# Altium PCB PiMX8MP_r0.3.PcbDoc (part 6 of 10)
Units mm, origin at the board's own origin, x right, y up, seen from the top; angles counter-clockwise.
Board outline 55 x 40 mm, 10 copper layers (Top Layer, Layer 1, Layer 2, Layer 3, Layer 4, Layer 5, Layer 6, Layer 7, Layer 8, Bottom Layer), stack 1.472 mm thick; 545 components, 477 nets, 2606 pads, 2278 vias.
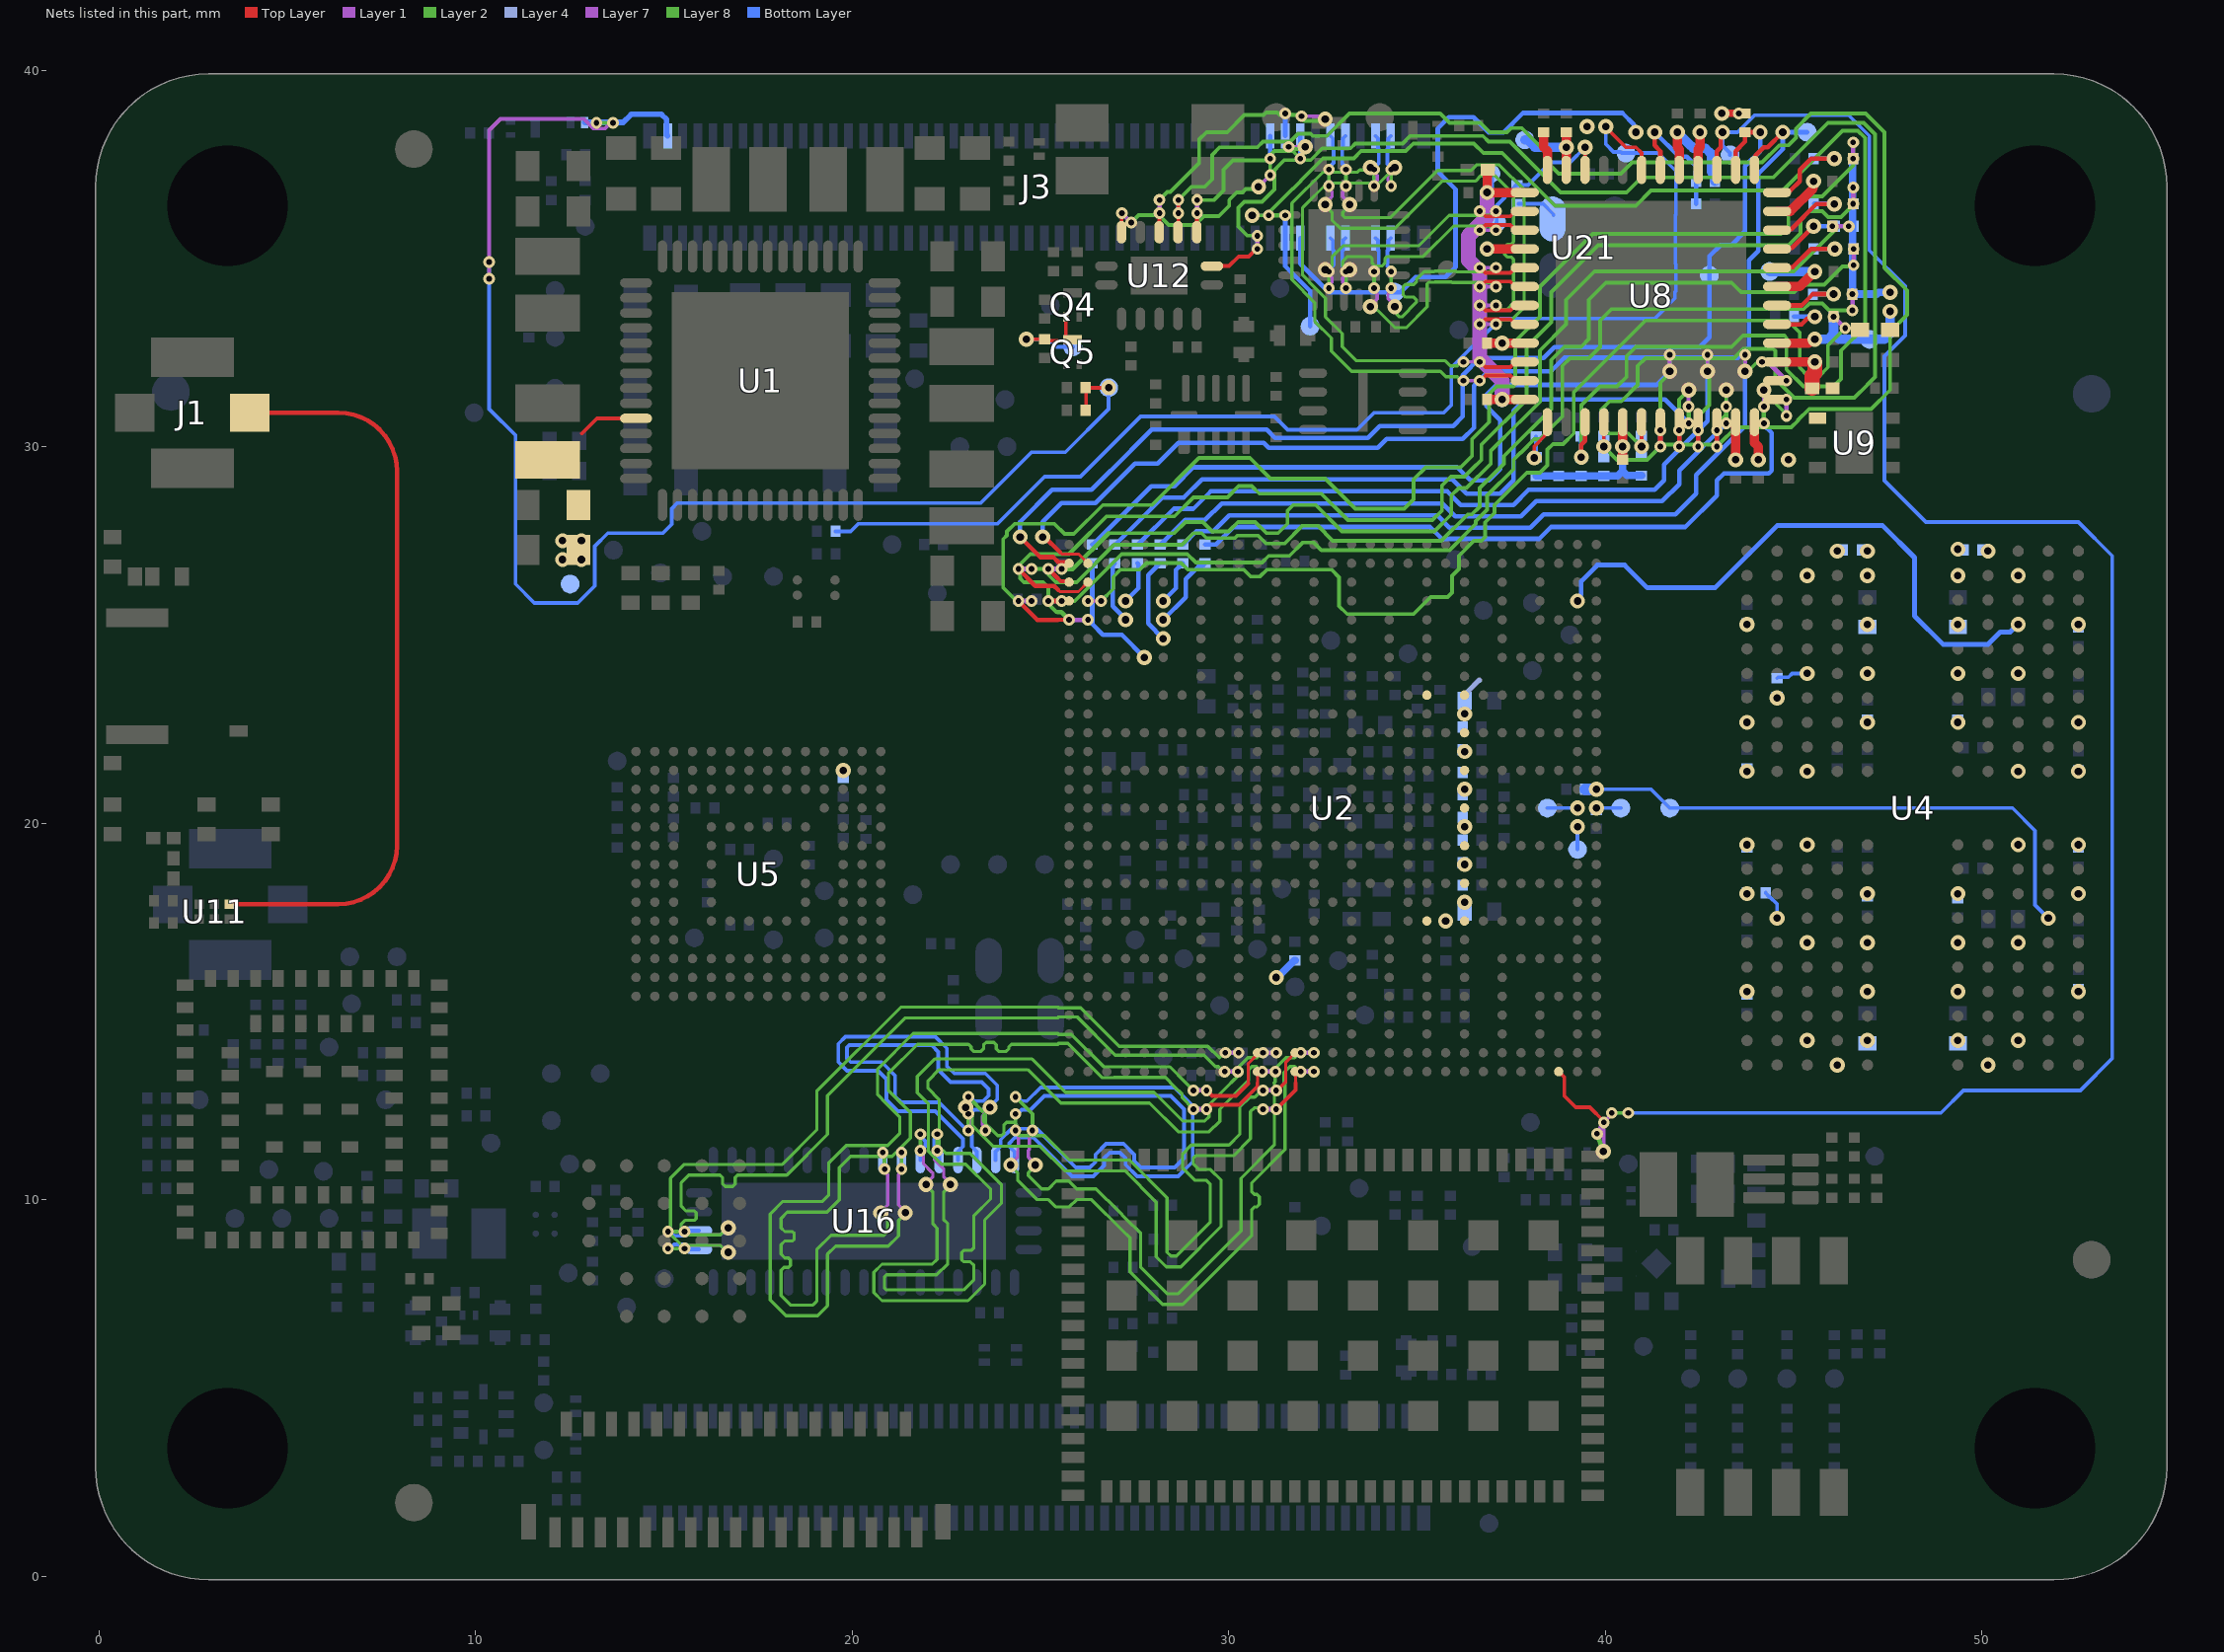
[diagram p14: the nets of this part, all layers, seen from the top]

## Via types
v1: diameter 0.4, hole 0.2, Top Layer to Bottom Layer, tented both sides, 946 vias
v2: diameter 0.31, hole 0.15, Top Layer to Layer 1, tented both sides, 321 vias
v3: diameter 0.31, hole 0.15, Layer 8 to Bottom Layer, tented both sides, 315 vias
v4: diameter 0.31, hole 0.15, Layer 1 to Layer 2, tented both sides, 257 vias
v5: diameter 0.31, hole 0.15, Layer 7 to Layer 8, tented both sides, 198 vias
v6: diameter 0.4, hole 0.2, Layer 2 to Layer 7, tented both sides, 169 vias
v7: diameter 0.31, hole 0.15, Top Layer to Layer 1, tented top, 72 vias

## Nets (pads, with @x,y where several pads share a name; then routed paths per layer and width w, separated by ;. In a path a pad name is that pad's centre, name@x,y a point inside that pad or via, vN(x,y) a via of type N, cw(c..) or ccw(c..) an arc to the next point about the centre after c; other vN are vias at no path point) (continued)
DRAM_B_DQS1_P: U2.AF2 U4.D10 | length 15.7
  Bottom Layer w0.13: v1(39.262,25.904) 39.262,25.978 39.358,26.074 39.358,26.426 39.787,26.854 40.516,26.854 41.116,26.254 42.912,26.254 43.312,26.654 44.562,27.904 47.366,27.904 48.212,27.058 48.212,25.508 48.966,24.754 50.162,24.754 50.487,25.079 50.751,25.079 50.951,25.279 v1(50.962,25.279)
DRAM_MTEST: TP22.TP U2.P2 | length 0.6
  Bottom Layer w0.1: TP22.TP@39.262,19.304 v1(39.262,19.904)
DRAM_ODT_CA_A: R51.2 U4.T2 | length 0.8
  Bottom Layer w0.1: R51.2@44.262,18.154 44.262,18.139 44.347,18.054 44.362,18.054 44.562,17.854 v1(44.562,17.479)
DRAM_ODT_CA_B: R48.2 U4.G2
  other v1: 44.562,23.329
DRAM_RESET: R10.2 TP23.TP U2.T1 U4.T11 | length 14.9
  Bottom Layer w0.1: v1(39.762,20.904) 41.212,20.904 TP23.TP@41.712,20.404 50.812,20.404 51.412,19.804 51.412,17.829 v1(51.762,17.479)
  Bottom Layer w0.3: R10.2@39.462,20.904 v1(39.762,20.904)
DRAM_VCC1.1: C17.1 C18.1 C91.1 C92.1 C93.1 C94.1 C95.1 C100.1 C101.1 C102.1 C103.1 C104.1 C121.1 C122.1 C123.1 C124.1 C125.1 C126.1 C127.1 C128.1 C129.1 C130.1 C131.1 C132.1 C133.1 C134.1 C135.1 C136.1 L6.2 R48.1 R51.1 R54.1 R55.1 TP7.TP U1.52 U2.AA8 U2.AA10 U2.J8 U2.J10 U2.L8 U2.N8 U2.R8 U2.U8 U2.W8 U4.A4 U4.A9 U4.AA3 U4.AA5 U4.AA8 U4.AA10 U4.AB4 U4.AB9 U4.B3 U4.B5 U4.B8 U4.B10 U4.D1 U4.D5 U4.D8 U4.D12 U4.F3 U4.F5 U4.F8 U4.F10 U4.H1 U4.H5 U4.H8 U4.H12 U4.K1 U4.K3 U4.K10 U4.K12 U4.N1 U4.N3 U4.N10 U4.N12 U4.R1 U4.R5 U4.R8 U4.R12 U4.U3 U4.U5 U4.U8 U4.U10 U4.W1 U4.W5 U4.W8 U4.W12 | length 2.9
  Top Layer w0.1: 12.824,30.354 13.224,30.754 U1.52@14.262,30.754
  Layer 4 w0.14: 36.357,23.504 36.657,23.804
  Bottom Layer w0.1: R48.1@44.562,23.854 44.586,23.879 44.862,23.879 44.963,23.979 v1(45.362,23.979)
  other v1: 46.162,13.579 50.162,13.579 45.362,14.229 46.962,14.229 49.362,14.229 50.962,14.229 43.762,15.529 46.962,15.529 49.362,15.529 52.562,15.529 45.362,16.829 46.962,16.829 49.362,16.829 50.962,16.829 35.762,17.404 36.262,17.904 43.762,18.129 46.962,18.129 49.362,18.129 52.562,18.129 36.262,18.904 43.762,19.429 45.362,19.429 50.962,19.429 52.562,19.429 36.262,19.904 36.262,20.904 43.762,21.379 45.362,21.379 50.962,21.379 52.562,21.379 36.262,21.904 43.762,22.679 46.962,22.679 49.362,22.679 52.562,22.679 36.262,22.904 46.962,23.979 49.362,23.979 50.962,23.979 43.762,25.279 46.962,25.279 49.362,25.279 52.562,25.279 45.362,26.579 46.962,26.579 49.362,26.579 50.962,26.579 12.312,27.005 12.812,27.004 46.162,27.229 50.162,27.229 12.312,27.505 12.812,27.504
DRAM_VREF: TP20.TP U2.R2 | length 0.8
  Bottom Layer w0.1: TP20.TP@38.462,20.404 v1(39.262,20.404)
DRAM_ZN: R11.2 TP21.TP U2.R1 | length 0.6
  Bottom Layer w0.1: v1(39.762,20.404) TP21.TP@40.412,20.404
DRAM_ZQ0: R54.2 U4.A5
  other v1: 46.962,27.229
DRAM_ZQ1: R55.2 U4.A8
  other v1: 49.362,27.279
DSI1_CLK_N: U2.B18 U16.34 | length 27.7
  Layer 1 w0.12: v4(30.912,13.904) v2(31.262,13.904)
  Layer 2 w0.085: v6(22.612,10.404) 22.612,10.38 22.43,10.197 22.43,9.474 22.54,9.364 22.54,8.298 22.246,8.004 20.912,8.004 20.862,7.954 20.862,7.654 20.912,7.604 22.959,7.604 23.235,7.88 23.235,8.254 23.135,8.354 22.962,8.354 22.912,8.404 22.912,8.604 22.962,8.654 23.161,8.654 23.235,8.728 23.235,9.577 23.677,10.019 23.677,10.286 23.019,10.944 22.369,10.944 22.027,11.286 22.027,12.539 21.729,12.838 21.729,13.274 22.194,13.739 24.78,13.739 25.665,12.854 28.015,12.854 28.78,12.089 29.362,12.089 29.477,12.204 29.477,12.523 30.059,13.104
  Layer 2 w0.09: 30.059,13.104 30.287,13.332 30.287,13.549 30.513,13.774 30.749,13.774 30.879,13.904 v4(30.912,13.904)
  Layer 7 w0.085: 22.18,11.161 22.18,11.072 22.23,11.022 22.232,11.022 22.43,10.824 22.43,10.612 22.612,10.429 v6(22.612,10.404)
  Layer 8 w0.1: v5(22.262,11.304) v3(22.262,11.744)
  Bottom Layer w0.1: v3(22.262,11.744) 22.262,11.688 22.177,11.603 22.177,11.413 22.312,11.278 U16.34@22.312,11.054
DSI1_CLK_P: U2.A18 U16.33 | length 28
  Layer 1 w0.12: v4(30.892,13.404) v2(31.242,13.404)
  Layer 2 w0.085: v6(21.962,10.404) 21.962,10.38 22.145,10.197 22.145,9.356 22.255,9.246 22.255,8.416 22.128,8.289 20.794,8.289 20.577,8.073 20.577,7.536 20.794,7.319 23.077,7.319 23.52,7.762 23.52,9.459 23.962,9.901 23.962,10.404 23.137,11.229 22.487,11.229 22.462,11.254 22.312,11.404 22.312,12.658 22.014,12.956 22.014,13.156 22.312,13.454 23.012,13.454 24.312,13.454 24.662,13.454 25.547,12.569 27.897,12.569 28.662,11.804 29.48,11.804 29.762,12.086 29.762,12.404 30.462,13.104
  Layer 2 w0.09: 30.462,13.104 30.527,13.169 30.527,13.449 30.612,13.534 30.729,13.534 30.859,13.404 v4(30.892,13.404)
  Layer 7 w0.085: v5(21.812,11.304) 21.812,11.244 21.895,11.161 21.895,10.954 22.111,10.737 22.114,10.737 22.145,10.706 22.145,10.612 21.962,10.429 v6(21.962,10.404)
  Layer 8 w0.1: v5(21.812,11.304) v3(21.812,11.744)
  Bottom Layer w0.1: U16.33@21.812,11.054 21.812,11.278 21.947,11.413 21.947,11.556 21.812,11.691 v3(21.812,11.744)
DSI1_D0_N: U2.B16 U16.38 | length 30
  Layer 1 w0.12: v4(31.912,13.904) v2(32.262,13.904)
  Layer 2 w0.085: v6(24.862,10.924) 24.862,10.9 24.68,10.717 24.68,10.644 25.034,10.289 25.212,10.289 25.42,10.497 25.755,10.497 25.962,10.289 26.48,10.289 27.077,9.693 27.264,9.506 27.662,9.108 27.662,8.204 28.362,7.504 28.659,7.504 30.327,9.173 30.327,10.569 31.21,11.452 31.21,13.104
  Layer 2 w0.09: 31.21,13.104 31.232,13.127 31.232,13.483 31.523,13.774 31.749,13.774 31.879,13.904 v4(31.912,13.904)
  Layer 7 w0.085: v5@24.787,11.779 24.705,11.696 24.705,11.432 24.705,11.339 24.68,11.314 24.68,11.132 24.862,10.949 v6(24.862,10.924)
  Layer 8 w0.1: v3(24.337,12.729) 24.787,12.279 v5(24.787,11.839)
  Bottom Layer w0.1: U16.38@24.312,11.054 24.312,11.278 24.177,11.413 24.177,11.504 24.327,11.654 24.812,11.654 25.842,10.624 26.407,10.624 26.692,10.909 26.692,11.104 26.842,11.254 27.112,11.254 27.262,11.104 27.262,10.929 27.566,10.624 28.657,10.624 29.042,11.009 29.042,12.5 28.557,12.984 25.007,12.984 24.642,12.619 24.501,12.619 24.391,12.729 v3(24.337,12.729)
DSI1_D0_P: U2.A16 U16.37 | length 29.8
  Layer 1 w0.12: v4(31.912,13.404) v2(32.262,13.404) v2@32.312,13.404
  Layer 2 w0.085: v6(24.212,10.924) 24.212,10.9 24.395,10.717 24.395,10.526 24.916,10.004 25.212,10.004 25.405,9.812 25.77,9.812 25.962,10.004 26.362,10.004 27.163,9.204 27.377,8.989 27.377,8.086 28.244,7.219 28.777,7.219 30.612,9.054 30.612,9.554 30.612,9.743 30.679,9.81 30.749,9.81 30.816,9.877 30.816,10.078 30.749,10.145 30.679,10.145 30.612,10.212 30.612,10.254 30.612,10.451 31.495,11.334 31.495,13.104
  Layer 2 w0.09: 31.495,13.104 31.472,13.127 31.472,13.384 31.623,13.534 31.749,13.534 31.879,13.404 v4(31.912,13.404)
  Layer 7 w0.085: v6(24.212,10.924) 24.212,10.949 24.395,11.132 24.395,11.432 24.42,11.457 24.42,11.696 v5@24.337,11.779
  Layer 8 w0.1: v5(24.337,11.839) v3(24.337,12.279)
  Bottom Layer w0.1: U16.37@23.812,11.054 23.812,11.278 23.947,11.413 23.947,11.6 24.232,11.884 24.907,11.884 25.937,10.854 26.312,10.854 26.462,11.004 26.462,11.2 26.747,11.484 27.207,11.484 27.492,11.2 27.492,11.024 27.662,10.854 28.562,10.854 28.812,11.104 28.812,12.404 28.462,12.754 25.102,12.754 24.737,12.389 24.501,12.389 24.391,12.279 v3(24.337,12.279)
DSI1_D1_N: U2.B17 U16.36 | length 29.5
  Top Layer w0.08: 31.499,13.12 31.517,13.138 31.517,13.659 U2.B17@31.762,13.904
  Top Layer w0.1: v2@31.258,12.879 31.499,13.12
  Layer 1 w0.12: v4(30.912,12.904) v2(31.262,12.904)
  Layer 2 w0.085: v6(23.662,12.454) 23.662,12.43 23.48,12.247 23.48,12.087 23.762,11.804 23.862,11.704 23.966,11.704 24.033,11.771 24.033,11.993 24.1,12.06 24.301,12.06 24.368,11.993 24.368,11.771 24.435,11.704 24.812,11.704 25.112,11.704 25.762,11.054 27.365,11.054 28.362,10.058 28.362,8.604 28.462,8.504 28.609,8.504 29.512,9.408 29.512,10.406 29.399,10.519 29.094,10.519 28.777,10.836 28.777,11.223 29.009,11.454 30.009,11.454 30.295,11.74 30.295,12.46 30.561,12.727 30.691,12.727 30.869,12.904 v4(30.912,12.904)
  Layer 7 w0.085: v5(23.537,11.839) 23.537,11.9 23.455,11.983 23.455,12.222 23.662,12.43 v6(23.662,12.454)
  Layer 8 w0.1: v3(23.087,12.729) 23.537,12.279 v5(23.537,11.839)
  Bottom Layer w0.1: v3(23.087,12.729) 23.141,12.729 23.251,12.619 23.477,12.619 23.622,12.764 23.622,12.944 23.442,13.124 22.617,13.124 22.288,13.453 22.288,13.929 22.112,14.104 19.921,14.104 19.862,14.046 19.862,13.754 19.962,13.654 20.787,13.654 21.142,13.3 21.142,12.75 21.307,12.584 22.307,12.584 23.177,11.715 23.177,11.413 23.312,11.278 U16.36@23.312,11.054
DSI1_D1_P: U2.A17 U16.35 | length 29.9
  Top Layer w0.08: U2.A17@31.762,13.404 31.776,13.39 31.776,13.104
  Top Layer w0.1: v2(31.262,12.404) 31.776,12.919 31.776,13.104
  Layer 1 w0.12: v4(30.912,12.404) v2(31.262,12.404)
  Layer 2 w0.085: v6(23.012,12.454) 23.012,12.43 23.195,12.247 23.195,11.969 23.744,11.419 24.994,11.419 25.644,10.769 27.247,10.769 28.077,9.939 28.077,8.486 28.261,8.303 28.344,8.219 28.727,8.219 29.797,9.289 29.797,10.524 29.517,10.804 29.212,10.804 29.062,10.954 29.062,11.104 29.127,11.169 30.127,11.169 30.58,11.622 30.58,12.342 30.679,12.442 30.875,12.442 v4(30.912,12.404)
  Layer 7 w0.085: v6(23.012,12.454) 23.012,12.405 23.17,12.247 23.17,11.983 23.087,11.9 v5(23.087,11.839)
  Layer 8 w0.1: v5(23.087,11.839) v3(23.087,12.279)
  Bottom Layer w0.1: U16.35@22.812,11.054 22.812,11.278 22.947,11.413 22.947,11.619 22.212,12.354 21.212,12.354 20.912,12.654 20.912,13.204 20.692,13.424 19.867,13.424 19.632,13.659 19.632,14.141 19.826,14.334 22.207,14.334 22.518,14.024 22.518,13.549 22.712,13.354 23.537,13.354 23.852,13.04 23.852,12.669 23.572,12.389 23.251,12.389 23.141,12.279 v3(23.087,12.279) v3@23.087,12.226
DSI1_D2_N: U2.B19 U16.32 | length 28.7
  Top Layer w0.08: 30.517,13.104 30.517,13.303 30.517,13.62 30.762,13.865 U2.B19@30.762,13.904
  Top Layer w0.1: v2(29.412,12.904) 29.562,12.754 30.187,12.754 30.517,13.085 30.517,13.104
  Layer 1 w0.12: v4(29.062,12.904) v2(29.412,12.904)
  Layer 2 w0.085: v6(21.412,9.654) 21.412,9.63 21.23,9.447 21.23,9.036 20.963,8.769 19.562,8.769 19.347,8.554 19.347,7.186 19.08,6.919 18.244,6.919 17.827,7.336 17.827,9.623 18.159,9.954 19.212,9.954 19.377,10.119 19.377,10.973 19.844,11.439 20.947,11.439 21.262,11.754 21.262,12.201 20.911,12.553 20.677,12.786 20.677,13.473 21.619,14.414 25.462,14.414 ; 26.686,13.531 28.436,13.531 28.843,13.123 v4(29.062,12.904)
  Layer 2 w0.09: 25.462,14.414 25.485,14.392 25.825,14.392 26.686,13.531
  Layer 7 w0.085: v5(21.312,10.814) 21.312,10.754 21.23,10.671 21.23,10.092 21.23,9.862 21.412,9.679 v6(21.412,9.654)
  Layer 8 w0.1: v5(21.312,10.814) v3(21.312,11.254)
DSI1_D2_P: U2.A19 U16.31 | length 28.6
  Top Layer w0.08: 30.762,13.104 U2.A19@30.762,13.404
  Top Layer w0.1: v2(29.412,12.404) 29.532,12.524 30.282,12.524 30.762,13.004 30.762,13.104
  Layer 1 w0.12: v4(29.062,12.404) v2(29.412,12.404)
  Layer 2 w0.085: v6(20.762,9.654) 20.762,9.63 20.945,9.447 20.945,9.154 20.845,9.054 19.444,9.054 19.062,8.673 19.062,7.304 18.962,7.204 18.362,7.204 18.112,7.454 18.112,8.129 18.187,8.204 18.312,8.204 18.362,8.254 18.362,8.405 18.312,8.454 18.212,8.454 18.112,8.554 18.112,8.804 18.212,8.904 18.412,8.904 18.462,8.954 18.462,9.104 18.412,9.154 18.212,9.154 18.112,9.254 18.112,9.504 18.277,9.669 19.33,9.669 19.662,10.001 19.662,10.854 19.962,11.154 21.065,11.154 21.547,11.636 21.547,12.319 20.962,12.904 20.962,13.354 21.737,14.129 22.712,14.129 22.755,14.129 23.09,14.129 23.157,14.062 23.157,14.006 23.224,13.939 23.425,13.939 23.492,14.006 23.492,14.112 23.559,14.179 23.76,14.179 23.827,14.112 23.827,14.006 23.894,13.939 24.095,13.939 24.162,14.006 24.162,14.062 24.229,14.129 24.87,14.129 24.912,14.129 25.462,14.129 ; 26.631,13.246 26.962,13.246 ; 28.318,13.246 28.558,13.005 28.765,12.799 28.765,12.713 29.062,12.416 v4(29.062,12.404)
  Layer 2 w0.09: 25.462,14.129 25.485,14.152 25.725,14.152 26.631,13.246 ; 26.962,13.246 28.318,13.246
  Layer 7 w0.085: v6(20.762,9.654) 20.762,9.679 20.945,9.862 20.945,10.21 20.945,10.671 20.862,10.754 v5(20.862,10.814)
  Layer 8 w0.1: v5(20.862,10.814) v3@20.862,11.254
  other v3: 20.812,11.254
DSI1_D3_N: U2.B20 U16.18 | length 24
  Layer 1 w0.12: v4(29.912,13.904) v2(30.262,13.904)
  Layer 2 w0.085: v6(16.712,8.604) 16.687,8.604 16.505,8.787 15.477,8.787 15.177,9.086 15.177,10.573 15.544,10.939 18.147,10.939 19.062,11.854 19.062,12.886 21.293,15.117 25.462,15.117
  Layer 2 w0.09: 25.462,15.117 25.485,15.094 26.072,15.094 27.087,14.079 28.397,14.079 29.444,14.079 29.749,13.774 29.879,13.904 v4(29.912,13.904)
  Layer 7 w0.085: v5(15.552,8.704) 15.613,8.704 15.696,8.787 16.157,8.787 16.505,8.787 16.687,8.604 v6(16.712,8.604)
  Layer 8 w0.1: v3(15.112,8.704) v5(15.552,8.704)
  Bottom Layer w0.1: v3(15.112,8.704) 15.166,8.704 15.276,8.814 15.363,8.814 15.458,8.814 15.579,8.814 15.714,8.679 U16.18@15.937,8.679
DSI1_D3_P: U2.A20 U16.19 | length 24.1
  Layer 1 w0.12: v4(29.892,13.404) v2(30.242,13.404)
  Layer 2 w0.085: v6(16.712,9.254) 16.687,9.254 16.505,9.072 15.595,9.072 15.562,9.104 15.462,9.204 15.462,9.354 15.562,9.454 15.812,9.454 15.862,9.504 15.862,9.654 15.812,9.704 15.587,9.704 15.462,9.829 15.462,10.454 15.662,10.654 16.116,10.654 16.493,10.654 16.56,10.587 16.56,10.421 16.627,10.354 16.828,10.354 16.895,10.421 16.895,10.587 16.962,10.654 17.912,10.654 18.265,10.654 19.347,11.736 19.347,12.768 21.411,14.832 25.462,14.832
  Layer 2 w0.09: 25.462,14.832 25.485,14.854 25.973,14.854 26.988,13.839 28.496,13.839 29.345,13.839 29.65,13.534 29.729,13.534 29.859,13.404 v4(29.892,13.404)
  Layer 7 w0.085: v5(15.552,9.154) 15.613,9.154 15.696,9.072 16.275,9.072 16.505,9.072 16.687,9.254 v6(16.712,9.254)
  Layer 8 w0.1: v3(15.112,9.154) v5(15.552,9.154)
  Bottom Layer w0.1: v3(15.112,9.154) 15.166,9.154 15.276,9.044 15.579,9.044 15.714,9.179 U16.19@15.937,9.179
DSI_VREG1_CAP: C114.1 U2.F18 | length 0.7
  Bottom Layer w0.2: v1(31.262,15.904) 31.3,15.904 31.642,16.247 31.642,16.249 31.747,16.354 C114.1@31.762,16.354
eMMC_VDDI: C141.1 U5.C2
  other v1: 19.762,21.404
EN_SHIFT: Q4.1 Q5.3 R160.1 TP103.TP | length 3.3
  Top Layer w0.1: v1(24.627,32.854) R160.1@25.112,32.854 ; R160.1@25.103,32.819 25.828,32.819 Q5.3@25.853,32.844 25.753,32.844 25.678,32.919 Q4.1@25.678,33.444
  Bottom Layer w0.1: v1(24.627,32.854) 25.228,32.854 25.428,32.654 TP103.TP@25.862,32.654
ENET_125O_SYNCE: J3.16 R98.1 TP70.TP | length 15.3
  Bottom Layer w0.12: J3.16@31.902,35.544 31.902,34.864 32.662,34.104 34.562,34.104 34.962,34.504 35.754,34.504 36.022,34.772 36.022,36.84 35.55,37.312 35.55,38.45 35.85,38.75 36.5,38.75 36.9,38.35 37.3,38.35 37.814,38.864 40.452,38.864 40.759,38.558 40.759,38.408 v1(40.812,38.354)
ENET_125O_SYNCE_R: R97.1 R98.2 R104.2 U8.42 | length 3.5
  Top Layer w0.12: v1(41.312,38.354) 41.312,38.004 41.462,37.854 U8.42@41.462,37.354
  Bottom Layer w0.12: v1(41.312,38.354) 41.962,37.704 42.162,37.704 42.399,37.467 42.399,37.067 R97.1@42.412,37.054 R104.2@42.412,36.454
ENET_I\N\T\: R75.1 TP67.TP U2.A3 U8.39 | length 53.9
  Top Layer w0.1: U2.A3@38.762,13.404 38.912,13.254 38.912,12.754 39.212,12.454 39.59,12.454 39.962,12.082 v2(39.962,12.054)
  Top Layer w0.12: U8.39@42.962,37.354 42.962,37.854 43.062,37.954 43.062,38.304 v1(43.112,38.354)
  Layer 1 w0.12: v4(39.78,11.753) v2@39.905,11.97
  Layer 2 w0.12: v4(39.78,11.753) v6(39.951,11.283)
  Layer 7 w0.1: v6(39.951,11.283) 39.951,12.052 40.172,12.273 v5(40.172,12.304)
  Layer 8 w0.1: v5(40.172,12.304) v3(40.612,12.304)
  Bottom Layer w0.1: v3(40.612,12.304) 48.912,12.304 49.512,12.904 52.612,12.904 53.462,13.754 53.462,27.104 52.562,28.004 48.512,28.004 47.412,29.104 47.412,32.404 47.962,32.954 47.962,34.263 47.012,35.213 47.012,38.254 46.462,38.804 43.962,38.804 43.512,38.354 v1(43.112,38.354) ; v1@43.112,38.346 43.112,38.004 43.312,37.804 TP67.TP@43.312,37.754
ENET_ISET: R91.1 U8.48 | length 1
  Top Layer w0.25: R91.1@38.362,38.354 38.362,37.954 38.462,37.854 U8.48@38.462,37.354
ENET_LED1_ACTIVITY: R94.1 R101.2 U8.18 U12.1 | length 40.7
  Top Layer w0.1: U12.1@29.553,34.799 30.006,34.799 30.262,35.054 30.531,35.054 30.731,35.254 v2(30.762,35.254) ; v1(40.962,30.004) U8.18@40.962,30.654
  Layer 1 w0.12: v2(30.762,35.254) v4(30.762,35.604)
  Layer 2 w0.1: v4(30.762,35.604) 30.757,35.609 30.49,35.609 30.254,35.846 30.254,36.346 30.412,36.504 30.887,36.504 31.212,36.83 31.212,37.349 31.262,37.399 31.262,37.404 31.473,37.616 32.176,37.616 32.489,37.928 33.236,37.928 33.362,38.054 34.619,38.054 34.819,38.254 36.752,38.254 36.902,38.104 37.462,38.104 38.812,36.754 40.562,36.754 40.962,37.154 44.462,37.154 45.912,38.604 46.862,38.604 47.162,38.304 47.162,31.854 46.962,31.654 46.962,31.652 46.615,31.304 45.012,31.304 44.512,31.804 44.512,32.546 44.454,32.604 43.662,32.604 43.412,32.354 41.067,32.354 40.862,32.149 40.862,31.644 40.422,31.204 40.112,31.204 39.887,30.979 39.887,30.534 40.067,30.354 40.612,30.354 v1(40.962,30.004)
ENET_LED2_LINK: R95.1 R102.2 U8.16 U12.3 | length 40
  Top Layer w0.1: U12.3@28.653,35.699 28.662,35.708 v2(28.662,36.554) ; v1(39.962,30.004) U8.16@39.962,30.654
  Layer 1 w0.12: v4(28.662,36.204) v2(28.662,36.554)
  Layer 2 w0.1: v4(28.662,36.204) v2(28.662,36.554) 29.012,36.904 29.362,36.904 29.562,37.104 29.562,37.754 29.762,37.954 30.762,37.954 30.912,38.104 31.628,38.104 31.839,38.316 32.176,38.316 32.237,38.254 32.607,38.254 33.207,38.854 35.612,38.854 35.862,38.604 36.684,38.604 36.934,38.354 37.39,38.354 37.501,38.466 37.776,38.466 38.387,37.854 38.387,37.629 38.762,37.254 40.412,37.254 40.712,37.554 44.162,37.554 44.612,38.004 44.857,38.004 45.062,38.209 45.062,38.454 45.462,38.854 46.912,38.854 47.412,38.354 47.412,34.754 48.012,34.154 48.012,33.504 47.562,33.054 47.562,31.504 47.062,31.004 45.412,31.004 45.117,30.709 45.117,30.696 44.939,30.517 43.475,30.517 43.012,30.054 41.512,30.054 41.112,29.654 40.312,29.654 v1(39.962,30.004)
ENET_LED3/GPIO2: J3.18 R96.1 R103.2 TP71.TP U8.15 | length 41.4
  Top Layer w0.12: v1(39.362,29.724) 39.362,30.054 39.462,30.154 U8.15@39.462,30.654
  Layer 2 w0.1: v6(30.622,36.144) 30.988,36.144 31.698,36.854 31.707,36.854 31.912,37.059 31.912,37.069 32.505,37.662 33.319,37.662 33.512,37.854 34.701,37.854 34.901,38.054 36.512,38.054 36.762,37.804 37.262,37.804 38.662,36.404 40.812,36.404 41.212,36.804 44.712,36.804 46.3,38.392 46.709,38.392 46.897,38.203 46.897,33.189 46.262,32.554 46.262,31.804 46.062,31.604 45.262,31.604 44.812,32.054 44.812,32.896 44.754,32.954 43.657,32.954 43.357,32.654 40.812,32.654 40.562,32.404 40.562,31.854 40.312,31.604 39.862,31.604 39.362,31.104 v1(39.362,29.724)
  Layer 7 w0.1: v6(30.622,36.144) v5(31.062,36.144)
  Layer 8 w0.12: v5(31.062,36.144) v3(31.502,36.144)
  Bottom Layer w0.12: v3(31.502,36.144) J3.18@31.502,35.544 31.502,34.794 32.162,34.134 TP71.TP@32.162,33.204 ; v1(39.362,29.724) R103.2@39.362,30.274
ENET_LED5/GPIO4: R92.1 R99.2 U8.13 | length 1.7
  Top Layer w0.1: v1(38.112,29.704) 38.112,30.009 38.39,30.287 38.39,30.292 38.462,30.364 U8.13@38.462,30.654
  Bottom Layer w0.1: v1(38.112,29.704) 38.142,29.704 R92.1@38.162,29.724 R99.2@38.162,30.274
ENET_MDC: TP61.TP U2.AH28 U8.37 | length 31.4
  Top Layer w0.08: 25.515,27.202 25.567,27.149 26.017,27.149 U2.AH28@26.262,26.904
  Top Layer w0.12: v1(25.062,27.604) 25.112,27.604 25.515,27.202 ; U8.37@43.962,37.354 43.987,37.379 43.987,37.729 44.212,37.954 44.312,37.954 v1(44.712,38.354)
  Bottom Layer w0.12: v1(25.062,27.604) 25.062,28.004 25.562,28.504 26.462,28.504 27.512,29.554 28.112,29.554 28.662,30.104 30.932,30.104 31.062,29.974 33.962,29.974 34.192,30.204 36.212,30.204 36.512,30.504 36.512,31.624 36.892,32.004 38.552,32.004 38.912,32.364 43.522,32.364 43.812,32.654 43.812,34.954 44.062,35.204 44.062,37.254 44.712,37.904 v1(44.712,38.354) TP61.TP@45.362,38.354
ENET_MDIO: R73.1 TP63.TP U2.AH29 U8.38 | length 30.8
  Top Layer w0.12: v1(24.462,27.604) 24.997,27.069 25.343,27.069 25.483,26.929 25.737,26.929 U2.AH29@25.762,26.904 ; U8.38@43.462,37.354 43.462,37.854 43.712,38.104 R73.1@43.712,38.354 v1(44.112,38.354)
  Bottom Layer w0.12: v1(24.462,27.604) 24.462,28.004 25.312,28.854 26.362,28.854 27.408,29.9 27.408,29.909 27.953,30.454 31.012,30.454 31.227,30.239 33.697,30.239 34.012,30.554 35.962,30.554 36.212,30.804 36.212,31.9 36.666,32.354 38.362,32.354 38.652,32.644 42.502,32.644 42.762,32.904 42.762,35.064 43.063,35.364 43.352,35.364 43.712,35.724 43.712,37.454 44.112,37.854 v1(44.112,38.354)
ENET_nLED1: J3.19 U12.6 | length 6.4
  Top Layer w0.1: U12.6@27.153,35.699 27.158,35.703 27.158,36.2 v2(27.162,36.204)
  Layer 1 w0.12: v2(27.162,36.204) v4(27.41,35.957)
  Layer 2 w0.1: v4(27.41,35.957) 27.607,36.154 28.147,36.154 28.412,35.889 29.097,35.889 29.337,36.129 29.737,36.129 30.012,36.404 30.012,36.554 30.212,36.754 30.357,36.754 30.449,36.846 30.734,36.846 v6(30.791,36.903)
  Layer 7 w0.1: v6(30.791,36.903) v5(31.102,37.214)
  Layer 8 w0.1: v5(31.102,37.214) v3(31.102,37.654)
  Bottom Layer w0.12: v3(31.102,37.654) J3.19@31.102,38.254
ENET_nLED2: J3.17 U12.4 | length 8.2
  Top Layer w0.1: U12.4@28.153,35.699 28.158,35.703 28.158,36.2 v2(28.162,36.204)
  Layer 1 w0.12: v2(28.162,36.204) v4(28.162,36.554)
  Layer 2 w0.1: v4(28.162,36.554) 28.372,36.764 28.447,36.764 29.212,37.53 29.212,38.154 29.412,38.354 29.962,38.354 30.417,38.809 30.927,38.809 30.997,38.88 31.287,38.88 31.358,38.809 31.857,38.809 32.012,38.654 32.512,38.654 v6(32.562,38.704)
  Layer 7 w0.1: v5(31.936,38.778) v6@32.407,38.778
  Layer 8 w0.1: v3(31.502,38.854) v5(31.936,38.778)
  Bottom Layer w0.12: J3.17@31.502,38.254 v3(31.502,38.854)
ENET_nLED3: J3.15 U12.2 | length 6.1
  Top Layer w0.1: U12.2@29.153,35.699 29.158,35.703 29.158,36.2 v2(29.162,36.204)
  Layer 1 w0.12: v2(29.162,36.204) v4(29.162,36.554)
  Layer 2 w0.1: v4(29.162,36.554) 29.612,36.554 29.862,36.804 29.862,37.354 30.112,37.604 30.962,37.604 31.212,37.854 31.712,37.854 31.766,37.908 31.974,37.908 v6(32.031,37.966)
  Layer 7 w0.1: v5(31.591,37.966) v6(32.031,37.966)
  Layer 8 w0.1: v5(31.591,37.966) v3(31.902,37.654)
  Bottom Layer w0.12: v3(31.902,37.654) J3.15@31.902,38.254
ENET_R\S\T\: R3.2 R74.1 TP64.TP U8.43 | length 33.5
  Top Layer w0.1: v1(40.012,38.504) 40.012,38.489 40.547,37.954 40.812,37.954 40.962,37.804 U8.43@40.962,37.354
  Bottom Layer w0.1: R3.2@19.562,27.754 19.962,27.754 20.162,27.954 23.862,27.954 25.112,29.204 26.062,29.204 27.662,30.804 31.212,30.804 31.567,30.449 33.407,30.449 33.862,30.904 35.712,30.904 35.912,31.104 35.912,32.104 37.212,33.404 41.312,33.404 41.85,33.942 41.85,34.111 41.875,34.136 41.875,34.847 41.862,34.859 41.862,36.149 41.875,36.162 41.875,37.325 41.4,37.8 40.442,37.8 40.409,37.833 40.217,37.833 40.012,38.038 v1(40.012,38.504)
ENET_RD0: R76.1 U2.AG29 | length 29.1
  Top Layer w0.1: 25.462,26.504 25.542,26.424 25.742,26.424 U2.AG29@25.762,26.404
  Top Layer w0.12: v2(25.212,26.754) 25.462,26.504
  Layer 1 w0.12: v2(25.212,26.754) v4(25.562,26.754) ; v2(46.032,35.854) v4(46.465,35.854)
  Layer 2 w0.1: 26.812,27.704 28.555,27.704 28.855,28.004 29.312,28.004 29.562,27.754 29.998,27.754 30.248,28.004 30.702,28.004 31.002,27.704 31.312,27.704 31.562,27.954 31.562,28.304 31.712,28.454 32.312,28.454 33.012,27.754 35.462,27.754 35.912,28.204 35.912,28.704 36.112,28.904 36.312,28.904 36.962,29.554 36.962,29.898 37.719,30.654 37.723,30.654 38.262,31.194 38.262,32.554 38.962,33.254 38.962,33.904 39.712,34.654 44.997,34.654 46.197,35.854 v4(46.465,35.854)
  Layer 2 w0.12: v4(25.562,26.754) 25.862,26.754 26.812,27.704
ENET_RD0_R: R72.1 R76.2 R89.2 U8.33 | length 1.8
  Top Layer w0.12: U8.33@44.562,35.254 44.587,35.279 44.957,35.279 45.442,35.764 45.457,35.764 45.532,35.839 v1(45.532,35.854)
  Bottom Layer w0.12: v1(45.532,35.854) R72.1@46.092,35.854
ENET_RD1: R77.1 U2.AG28 | length 31
  Top Layer w0.08: 25.462,26.204 25.512,26.154 26.012,26.154 U2.AG28@26.262,26.404
  Top Layer w0.12: v2(24.417,26.754) 24.867,26.304 25.362,26.304 25.462,26.204
  Layer 1 w0.12: v2(24.417,26.754) v4(24.767,26.754) ; v4(46.592,34.822) v2(46.592,35.254)
  Layer 2 w0.1: v4(24.767,26.754) 25.062,26.754 25.412,26.404 25.962,26.404 26.958,27.4 28.758,27.4 29.062,27.704 29.279,27.704 29.409,27.574 30.166,27.574 30.231,27.639 30.777,27.639 30.877,27.539 30.88,27.539 30.989,27.431 31.489,27.431 31.962,27.904 32.362,27.904 32.762,27.504 35.647,27.504 36.347,28.204 36.457,28.204 36.662,28.409 36.662,28.904 37.307,29.549 37.307,29.749 38.562,31.004 38.562,32.304 38.912,32.654 39.357,32.654 39.562,32.859 39.562,33.904 40.012,34.354 43.357,34.354 43.512,34.199 43.607,34.104 45.012,34.104 45.212,34.304 45.817,34.304 46.3,34.788 46.558,34.788 v4(46.592,34.822)
ENET_RD1_R: R71.1 R77.2 R88.2 U8.32 | length 2.3
  Top Layer w0.12: U8.32@44.562,34.754 44.583,34.775 44.983,34.775 45.462,35.254 v1(46.092,35.254)
  Bottom Layer w0.12: R88.2@45.532,35.254 v1(46.092,35.254)
ENET_RD2: R78.1 U2.AF29 | length 27.6
  Top Layer w0.12: v2(25.212,25.904) U2.AF29@25.762,25.904
  Layer 1 w0.12: v2(25.212,25.904) v4(25.562,25.904) ; v4(46.562,33.622) v2(46.562,34.054)
  Layer 2 w0.1: v4(25.562,25.904) 25.912,25.904 27.158,27.15 28.9,27.15 29.126,26.924 30.882,26.924 31.062,27.104 31.612,27.104 31.962,27.454 32.262,27.454 32.462,27.254 35.862,27.254 36.562,27.954 36.562,28.027 36.862,28.327 36.862,28.704 37.562,29.404 37.562,29.654 37.757,29.849 37.762,29.849 38.115,30.202 38.26,30.202 38.862,30.804 38.862,32.149 39.067,32.354 39.562,32.354 39.862,32.654 39.862,33.354 40.162,33.654 45.267,33.654 45.417,33.804 45.762,33.804 45.945,33.622 v4(46.562,33.622)
ENET_RD2_R: R70.1 R78.2 R87.2 U8.30 | length 2.2
  Top Layer w0.12: U8.30@44.562,33.754 45.212,33.754 45.512,34.054 v1(46.062,34.054)
  Bottom Layer w0.12: R87.2@45.512,34.054 v1(46.062,34.054)
ENET_RD3: R79.1 U2.AF28 | length 29.3
  Layer 1 w0.1: v2(26.262,25.904) v4(26.612,25.904)
  Layer 1 w0.12: v2(46.062,33.454) v4(46.368,33.149)
  Layer 2 w0.1: v4(26.612,25.904) 26.932,26.224 26.932,26.541 27.126,26.734 27.634,26.734 27.814,26.914 28.736,26.914 28.916,26.734 30.399,26.734 30.579,26.554 30.832,26.554 31.012,26.734 32.732,26.734 32.932,26.534 32.932,25.768 33.146,25.554 34.912,25.554 35.362,26.004 35.812,26.004 35.932,26.124 35.932,26.574 36.112,26.754 36.112,27.104 36.512,27.504 36.712,27.504 36.812,27.604 36.812,27.994 37.062,28.244 37.062,28.454 37.917,29.309 38.267,29.309 38.462,29.504 38.462,29.924 38.612,30.074 38.882,30.074 39.162,30.354 39.162,31.449 41.067,33.354 44.837,33.354 45.162,33.029 45.162,32.104 45.385,31.882 45.685,31.882 45.912,32.109 45.912,32.693 v4(46.368,33.149)
ENET_RD3_R: R69.1 R79.2 R86.2 U8.29 | length 1.6
  Top Layer w0.12: U8.29@44.562,33.254 45.212,33.254 45.362,33.404 45.512,33.404 v1(45.562,33.454)
  Bottom Layer w0.12: R86.2@45.012,33.454 v1(45.562,33.454)
ENET_RX_CTL: R82.1 U2.AE28 | length 32.8
  Layer 1 w0.12: v4(25.762,25.404) v2(26.262,25.404) ; v2(46.582,36.454) v4(46.582,36.887)
  Layer 2 w0.1: 25.462,25.604 25.45,25.616 25.419,25.616 25.212,25.823 25.212,26.254 25.062,26.404 24.562,26.404 24.462,26.504 24.462,26.881 24.731,27.15 25.758,27.15 ; 26.312,27.704 26.758,28.15 28.558,28.15 29.067,28.659 29.967,28.659 30.262,28.954 30.612,28.954 30.812,28.754 32.462,28.754 33.167,28.049 35.407,28.049 35.662,28.304 35.662,28.967 35.9,29.204 36.262,29.204 36.457,29.399 36.712,29.654 36.712,30.054 37.912,31.254 37.912,32.654 38.562,33.304 38.562,34.104 39.812,35.354 44.862,35.354 45.182,35.674 45.182,36.024 45.412,36.254 45.762,36.254 45.92,36.097 46.255,36.097 46.582,36.424 v4(46.582,36.887)
  Layer 2 w0.12: 25.462,25.604 25.562,25.604 v4(25.762,25.404) ; 25.758,27.15 26.312,27.704
ENET_RX_CTL_R: R67.1 R82.2 R84.2 U8.34 | length 2.6
  Top Layer w0.12: U8.34@44.832,35.754 U8.34@44.562,35.754 44.587,35.779 44.937,35.779 45.605,36.447 v1(46.082,36.447)
  Bottom Layer w0.12: R84.2@45.542,36.454 R67.1@46.092,36.454
ENET_RXC: R81.1 U2.AE29 | length 35.6
  Top Layer w0.1: 25.462,25.404 U2.AE29@25.762,25.404
  Top Layer w0.12: v2(24.417,25.904) 24.917,25.404 25.462,25.404
  Layer 1 w0.12: v2(24.417,25.904) v4(24.767,25.904) ; v2(46.582,37.654) v4(46.582,38.087)
  Layer 2 w0.1: v4(24.767,25.904) 24.365,25.904 24.012,26.257 24.012,27.549 24.112,27.649 24.112,27.749 24.317,27.954 24.842,27.954 25.367,27.954 25.64,27.682 25.885,27.682 26.657,28.454 27.962,28.454 29.212,29.704 30.562,29.704 31.112,29.154 32.562,29.154 33.362,28.354 34.662,28.354 34.912,28.604 34.912,29.132 35.234,29.454 36.162,29.454 36.462,29.754 36.462,30.204 36.912,30.654 36.912,31.399 37.117,31.604 37.554,31.604 37.612,31.663 37.612,32.804 38.262,33.454 38.262,34.254 39.662,35.654 44.662,35.654 44.862,35.854 44.862,36.204 45.312,36.654 45.762,36.654 46.582,37.474 v4(46.582,38.087)
ENET_RXC_R: R68.1 R81.2 R85.2 U8.36 | length 2.6
  Top Layer w0.12: U8.36@44.562,36.754 44.847,36.754 44.912,36.819 44.927,36.819 45.162,37.054 45.162,37.354 45.462,37.654 v1(46.082,37.654)
  Bottom Layer w0.12: R85.2@45.532,37.654 v1(46.082,37.654)
ENET_TD0: R177.1 U2.AC25 | length 3.4
  Bottom Layer w0.12: R177.1@26.377,26.904 26.377,25.289 26.662,25.004 27.162,25.004 v1(27.762,24.404)
ENET_TD0_R: R177.2 U8.19 | length 22.9
  Top Layer w0.12: v2(41.462,30.004) U8.19@41.462,30.654
  Layer 1 w0.12: v2(41.462,30.004) v4(41.462,30.437)
  Layer 2 w0.1: v4(41.462,30.437) 41.462,31.704 41.712,31.954 v6(41.712,32.004)
  Layer 7 w0.1: v6(41.712,32.004) v5(41.712,32.444)
  Layer 8 w0.12: v6(41.712,32.004) v5(41.712,32.444)
  Bottom Layer w0.12: R177.2@26.377,27.404 26.392,27.404 27.942,28.954 28.562,28.954 29.062,29.454 36.07,29.454 36.42,29.104 36.912,29.104 37.212,29.404 37.212,30.704 36.837,31.079 36.837,31.379 37.102,31.644 41.361,31.644 41.712,31.995 v6(41.712,32.004)
  other v3: 41.712,32.004
ENET_TD1: R178.1 U2.AE26 | length 1.7
  Bottom Layer w0.12: R178.1@26.977,26.904 26.922,26.849 26.922,25.764 27.262,25.424 v1(27.262,25.404)
ENET_TD1_R: R178.2 U8.20 | length 21.6
  Top Layer w0.12: v2(41.962,30.004) U8.20@41.962,30.654
  Layer 1 w0.12: v2(41.962,30.004) v4(41.962,30.437)
  Layer 2 w0.1: v4(41.962,30.437) 41.962,31.254 v6(42.212,31.504)
  Layer 7 w0.1: v5(42.212,31.064) v6(42.212,31.504)
  Layer 8 w0.12: v3(42.212,30.624) v5(42.212,31.064)
  Bottom Layer w0.12: R178.2@26.977,27.404 26.992,27.404 28.242,28.654 28.812,28.654 29.292,29.134 35.937,29.134 36.317,28.754 37.212,28.754 37.562,29.104 37.562,30.954 37.862,31.254 41.582,31.254 v3(42.212,30.624)
ENET_TD2: R179.1 U2.AF26 | length 1.2
  Bottom Layer w0.12: v1(27.262,25.904) 27.602,26.244 27.602,26.879 R179.1@27.577,26.904
ENET_TD2_R: R179.2 U8.21 | length 22
  Top Layer w0.12: v2(42.462,30.004) U8.21@42.462,30.654
  Layer 1 w0.12: v2(42.462,30.004) v4(42.462,30.437)
  Layer 2 w0.1: v4(42.462,30.437) 42.462,30.804 42.762,31.104 42.762,31.954 v6(42.712,32.004)
  Layer 7 w0.1: v6(42.712,32.004) v5(42.712,32.444)
  Layer 8 w0.12: v6(42.712,32.004) v5(42.712,32.444)
  Bottom Layer w0.12: R179.2@27.577,27.404 27.592,27.404 28.542,28.354 29.062,28.354 29.522,28.814 35.805,28.814 36.165,28.454 37.562,28.454 37.962,28.854 41.312,28.854 41.562,29.104 41.562,29.529 42.712,30.679 v6(42.712,32.004)
  other v3: 42.712,32.004
ENET_TD3: R180.1 U2.AD24 | length 2.3
  Bottom Layer w0.12: R180.1@28.177,26.904 28.162,26.904 28.087,26.829 28.087,26.814 27.862,26.589 27.862,25.304 v1(28.262,24.904)
ENET_TD3_R: R180.2 U8.22 | length 20
  Top Layer w0.12: v2(42.962,30.004) U8.22@42.962,30.654
  Layer 1 w0.12: v2(42.962,30.004) v4(42.962,30.437)
  Layer 2 w0.1: v4(42.962,30.437) 42.994,30.469 42.994,30.636 43.212,30.854 v6(43.212,31.504)
  Layer 7 w0.1: v5(43.212,31.064) v6(43.212,31.504)
  Layer 8 w0.12: v3(43.212,30.624) v5(43.212,31.064)
  Bottom Layer w0.12: R180.2@28.177,27.404 28.192,27.404 28.842,28.054 29.372,28.054 29.812,28.494 35.672,28.494 36.012,28.154 37.762,28.154 38.162,28.554 41.512,28.554 41.962,29.004 41.962,29.374 v3@43.21,30.623
ENET_TX_CTL: R182.1 U2.AF24 | length 1.2
  Bottom Layer w0.12: v1(28.262,25.904) 28.602,26.244 28.602,26.729 28.687,26.814 28.687,26.829 28.762,26.904 R182.1@28.777,26.904
ENET_TX_CTL_R: R182.2 U8.26 | length 20.8
  Top Layer w0.12: U8.26@44.562,31.754 v2(44.812,31.754)
  Layer 1 w0.12: v4(44.162,32.254) 44.199,32.218 44.349,32.218 v2(44.812,31.754)
  Layer 2 w0.1: v6(43.712,32.004) 43.788,32.004 43.997,32.214 44.122,32.214 v4(44.162,32.254)
  Layer 7 w0.1: v6(43.712,32.004) v5(43.712,32.444)
  Layer 8 w0.12: v6(43.712,32.004) v5(43.712,32.444)
  Bottom Layer w0.12: R182.2@28.777,27.404 28.792,27.404 29.142,27.754 29.592,27.754 30.012,28.174 35.542,28.174 35.862,27.854 38.012,27.854 38.362,28.204 41.862,28.204 42.412,28.754 42.412,29.254 43.712,30.554 v6(43.712,32.004)
  other v3: 43.712,32.004
ENET_TXC: R181.1 U2.AE24 | length 2
  Bottom Layer w0.12: v1(28.262,25.404) 28.862,26.004 28.862,26.485 29.206,26.829 29.302,26.829 R181.1@29.377,26.904
ENET_TXC_R: R181.2 U8.25 | length 19.9
  Layer 1 w0.12: v4(44.812,30.822) v2(44.812,31.254)
  Layer 2 w0.1: v6(44.212,31.504) 44.212,31.463 44.812,30.863 v4(44.812,30.822)
  Layer 7 w0.1: v5(44.212,31.064) v6(44.212,31.504)
  Layer 8 w0.12: v3(44.212,30.624) v5(44.212,31.064)
  Bottom Layer w0.12: R181.2@29.377,27.404 29.662,27.404 30.127,27.869 35.35,27.869 35.665,27.554 38.247,27.554 38.562,27.869 42.127,27.869 42.962,28.704 42.962,29.104 43.152,29.294 44.342,29.294 44.422,29.375 44.422,30.363 44.212,30.573 v3(44.212,30.624)
ENET_VDD: C161.1 C162.1 C163.1 C164.1 L8.1 TP66.TP U8.23 U8.27 U8.31 U8.40 | length 6.1
  Top Layer w0.25: U8.40@42.462,37.354 42.462,37.904 42.512,37.954 v1(42.512,38.354) ; v1(43.462,29.654) U8.23@43.462,30.654 ; U8.27@44.562,32.254 v1(45.562,32.254) ; U8.31@44.562,34.254 45.162,34.254 45.537,34.629 45.552,34.629 45.562,34.639 v1(45.562,34.654)
  Top Layer w0.4: L8.1@45.492,31.554 45.492,31.884 45.562,31.954 v1(45.562,32.254)
  Bottom Layer w0.25: TP66.TP@44.362,34.654 v1(45.562,34.654)
ENET_VDDAH: C154.1 C155.1 L7.1 TP62.TP U8.1 U8.12 | length 9.2
  Top Layer w0.25: C154.1@36.862,31.254 U8.12@37.862,31.254 ; L7.1@36.882,37.354 36.862,37.334 v1(36.862,36.754) U8.1@37.862,36.754
  Layer 7 w0.4: v1(36.862,36.754) 36.862,36.104 36.362,35.604 36.362,34.954 36.662,34.654 36.662,32.354 37.262,31.754 v1(37.262,31.254)
  Bottom Layer w0.25: v1(36.862,36.754) 36.862,36.795 36.917,36.85 36.917,37.209 TP62.TP@36.962,37.254
ENET_VDDAL: C156.1 C157.1 C158.1 C159.1 L8.2 TP65.TP U8.4 U8.9 U8.47 U9.1 | length 4.2
  Top Layer w0.25: C156.1@36.862,32.754 v1(37.262,32.754) U8.9@37.862,32.754 ; v1(36.862,35.254) U8.4@37.862,35.254 ; U8.47@38.962,37.354 C158.1@38.962,38.354
  Bottom Layer w0.25: TP65.TP@37.862,38.154 37.93,38.154 38.13,37.954 v1(38.962,37.954)
  other v1: 44.862,29.654
ENET_XI: R90.2 TP68.TP U8.46 | length 4.1
  Top Layer w0.1: U8.46@39.462,37.354 v1(39.462,37.954)
  Bottom Layer w0.1: TP68.TP@37.112,35.954 37.119,35.962 37.119,36.417 37.55,36.847 37.55,36.865 37.635,36.95 R90.2@37.664,36.95 ; R90.2@37.65,36.95 37.95,36.95 38.554,37.554 39.062,37.554 v1(39.462,37.954)
ENET_XI_CLK: R90.1 U21.3 | length 1.1
  Bottom Layer w0.1: R90.1@37.7,36.45 38.348,36.45 38.625,36.173 U21.3@38.625,36.15
ETH_TRX0_N: J3.10 U8.3 | length 8.7
  Top Layer w0.1: v2(36.662,35.754) 36.691,35.754 36.826,35.889 37.054,35.889 37.358,35.889 37.479,35.889 37.614,35.754 U8.3@37.862,35.754
  Layer 1 w0.1: v2(36.662,35.754) v4(37.095,35.754)
  Layer 2 w0.085: v6(33.212,34.704) 33.13,34.704 33.03,34.804 33.03,34.922 33.162,35.054 33.366,35.054 33.744,35.054 33.811,34.987 33.811,34.869 33.878,34.802 34.079,34.802 34.146,34.869 34.146,34.987 34.213,35.054 34.366,35.054 35.162,35.054 35.97,35.862 36.932,35.862 37.04,35.754 v4(37.095,35.754)
  Layer 7 w0.085: v5(33.112,34.214) 33.112,34.275 33.03,34.358 33.03,34.497 33.212,34.68 v6(33.212,34.704)
  Layer 8 w0.1: v5(33.112,34.214) v3(33.112,34.654)
  Bottom Layer w0.1: 33.017,34.806 33.017,35.206 33.037,35.226 33.037,35.479 J3.10@33.102,35.544
ETH_TRX0_P: J3.12 U8.2 | length 9.1
  Top Layer w0.1: v2(36.662,36.254) 36.691,36.254 36.826,36.119 36.959,36.119 37.263,36.119 37.479,36.119 37.614,36.254 U8.2@37.862,36.254
  Layer 1 w0.1: v2(36.662,36.254) v4(37.095,36.254)
  Layer 2 w0.085: v6(32.562,34.704) 32.645,34.704 32.745,34.804 32.745,35.04 33.044,35.339 35.044,35.339 35.852,36.147 36.932,36.147 37.04,36.254 v4(37.095,36.254)
  Layer 7 w0.085: v6(32.562,34.704) 32.562,34.68 32.745,34.497 32.745,34.358 32.662,34.275 v5(32.662,34.214)
  Layer 8 w0.1: v5(32.662,34.214) v3(32.662,34.654)
  Bottom Layer w0.1: v3(32.662,34.654) 32.662,34.708 32.787,34.833 32.787,35.206 32.767,35.226 32.767,35.479 J3.12@32.702,35.544
ETH_TRX1_N: J3.6 U8.6 | length 8.2
  Top Layer w0.1: v2(36.662,34.254) 36.691,34.254 36.826,34.389 37.054,34.389 37.358,34.389 37.479,34.389 37.614,34.254 U8.6@37.862,34.254
  Layer 1 w0.1: v2(36.662,34.254) v4(37.095,34.254)
  Layer 2 w0.085: v6(33.762,33.724) 33.847,33.724 33.949,33.623 33.953,33.623 34.412,33.164 34.718,33.164 35.27,33.716 35.27,34.325 35.314,34.369 35.47,34.369 35.477,34.377 35.916,34.377 35.931,34.362 36.932,34.362 37.04,34.254 v4(37.095,34.254)
  Layer 7 w0.085: v6(33.762,33.724) 33.762,33.749 33.945,33.932 33.945,34.071 33.862,34.154 v5(33.862,34.214)
  Layer 8 w0.1: v5(33.862,34.214) v3(33.862,34.654)
  Bottom Layer w0.1: v3(33.862,34.654) 33.862,34.708 33.987,34.833 33.987,35.206 33.967,35.226 33.967,35.479 J3.6@33.902,35.544
ETH_TRX1_P: J3.4 U8.5 | length 8.1
  Top Layer w0.1: v2(36.662,34.754) 36.691,34.754 36.826,34.619 36.959,34.619 37.263,34.619 37.479,34.619 37.614,34.754 U8.5@37.862,34.754
  Layer 1 w0.1: v2(36.662,34.754) v4(37.095,34.754)
  Layer 2 w0.085: v6(34.412,33.724) 34.472,33.664 34.472,33.507 34.53,33.449 34.6,33.449 34.985,33.834 34.985,33.866 34.985,33.908 34.918,33.975 34.698,33.975 34.631,34.042 34.631,34.243 34.698,34.31 34.918,34.31 34.985,34.377 34.985,34.443 35.196,34.654 35.462,34.654 35.47,34.662 35.63,34.662 36.034,34.662 36.049,34.647 36.932,34.647 37.04,34.754 v4(37.095,34.754)
  Layer 7 w0.085: v5(34.312,34.214) 34.312,34.154 34.23,34.071 34.23,33.932 34.412,33.749 v6(34.412,33.724)
  Layer 8 w0.1: v5(34.312,34.214) v3(34.312,34.654)
  Bottom Layer w0.1: J3.4@34.302,35.544 34.237,35.479 34.237,35.226 34.217,35.206 34.217,34.806 34.312,34.711 v3(34.312,34.654)
ETH_TRX2_N: J3.9 U8.8 | length 13.9
  Top Layer w0.1: v2(36.662,33.254) 36.691,33.254 36.826,33.389 37.054,33.389 37.358,33.389 37.479,33.389 37.614,33.254 U8.8@37.862,33.254
  Layer 1 w0.1: v2(36.662,33.254) v4(37.095,33.254)
  Layer 2 w0.085: v6(33.212,36.434) 33.212,36.41 33.03,36.227 33.03,36.139 33.08,36.089 34.297,36.089 35.547,37.339 36.432,37.339 36.58,37.488 37.182,37.488 37.847,36.823 37.847,33.704 37.505,33.362 37.257,33.362 37.149,33.254 v4(37.095,33.254)
  Layer 7 w0.085: v5(33.112,36.924) 33.112,36.864 33.03,36.781 33.03,36.642 33.212,36.459 v6(33.212,36.434)
  Layer 8 w0.1: v5(33.112,36.924) v3(33.112,37.364)
  Bottom Layer w0.1: J3.9@33.102,38.254 33.037,38.189 33.037,37.936 33.017,37.916 33.017,37.516 33.112,37.421 v3(33.112,37.364)
ETH_TRX2_P: J3.11 U8.7 | length 13.7
  Top Layer w0.1: v2(36.662,33.754) 36.691,33.754 36.826,33.619 36.959,33.619 37.263,33.619 37.479,33.619 37.614,33.754 U8.7@37.862,33.754
  Layer 1 w0.1: v2(36.662,33.754) v4(37.095,33.754)
  Layer 2 w0.085: v6(32.562,36.434) 32.562,36.41 32.745,36.227 32.745,36.021 32.961,35.804 34.415,35.804 35.665,37.054 36.55,37.054 36.698,37.203 37.064,37.203 37.362,36.904 37.562,36.704 37.562,35.554 37.562,35.444 37.495,35.377 37.397,35.377 37.33,35.31 37.33,35.109 37.397,35.042 37.495,35.042 37.562,34.975 37.562,34.932 37.562,33.822 37.387,33.647 37.257,33.647 37.149,33.754 v4(37.095,33.754)
  Layer 7 w0.085: v6(32.562,36.434) 32.562,36.459 32.745,36.642 32.745,36.781 32.662,36.864 v5(32.662,36.924)
  Layer 8 w0.1: v5(32.662,36.924) v3(32.662,37.364)
  Bottom Layer w0.1: v3(32.662,37.364) 32.662,37.418 32.787,37.543 32.787,37.916 32.767,37.936 32.767,38.189 J3.11@32.702,38.254
ETH_TRX3_N: J3.5 U8.11 | length 14.4
  Top Layer w0.1: v2(36.662,31.754) 36.691,31.754 36.826,31.889 37.054,31.889 37.358,31.889 37.479,31.889 37.614,31.754 U8.11@37.862,31.754
  Layer 1 w0.1: v4(36.23,31.754) v2(36.662,31.754)
  Layer 2 w0.085: v6(33.762,37.414) 33.702,37.354 33.477,37.354 33.412,37.289 32.497,37.289 31.677,36.469 31.677,34.436 32.285,33.829 32.285,33.332 32.727,32.889 32.727,32.538 33.261,32.004 35.619,32.004 35.762,31.862 36.068,31.862 36.175,31.754 v4(36.23,31.754)
  Layer 7 w0.085: v6(33.762,37.414) 33.762,37.39 33.945,37.207 33.945,37.068 33.862,36.985 v5(33.862,36.924)
  Layer 8 w0.1: v5(33.862,36.924) v3(33.862,37.364)
  Bottom Layer w0.1: v3(33.862,37.364) 33.862,37.418 33.987,37.543 33.987,37.916 33.967,37.936 33.967,38.189 J3.5@33.902,38.254
ETH_TRX3_P: J3.3 U8.10 | length 14.2
  Top Layer w0.1: v2(36.662,32.254) 36.691,32.254 36.826,32.119 36.959,32.119 37.263,32.119 37.479,32.119 37.614,32.254 U8.10@37.862,32.254
  Layer 1 w0.1: v4(36.23,32.254) v2(36.662,32.254)
  Layer 2 w0.085: v6(34.412,37.414) 34.002,37.004 32.615,37.004 31.962,36.351 31.962,34.554 32.312,34.204 32.403,34.114 32.57,33.947 32.57,33.45 33.012,33.008 33.012,32.656 33.379,32.289 35.737,32.289 35.88,32.147 36.068,32.147 36.175,32.254 v4(36.23,32.254)
  Layer 7 w0.085: v5(34.312,36.924) 34.312,36.985 34.23,37.068 34.23,37.207 34.412,37.39 v6(34.412,37.414)
  Layer 8 w0.1: v5(34.312,36.924) v3(34.312,37.364)
  Bottom Layer w0.1: J3.3@34.302,38.254 34.237,38.189 34.237,37.936 34.217,37.916 34.217,37.516 34.312,37.421 v3(34.312,37.364)
ETH_VDDIO: C149.1 C150.1 C151.1 C152.1 C153.1 R67.2 R68.2 R69.2 R70.2 R71.2 R72.2 R73.2 R74.2 R75.2 R80.1 R83.1 R92.2 R93.2 R94.2 R95.2 R96.2 R97.2 TP60.TP U8.17 U8.24 U8.28 U8.35 U8.41 | length 20.4
  Top Layer w0.2: v2(43.112,38.854) R73.2@43.712,38.854
  Top Layer w0.25: C152.1@40.462,29.654 U8.17@40.462,30.654 ; v1(41.912,38.354) 41.912,37.954 41.962,37.904 U8.41@41.962,37.354 ; U8.24@43.962,30.654 43.962,30.104 44.062,30.004 v1(44.062,29.654) ; U8.28@44.562,32.754 45.406,32.754 45.481,32.829 45.552,32.829 45.562,32.839 v1(45.562,32.854) ; U8.35@44.562,36.254 44.912,36.254 45.522,36.864 45.522,37.044 v1(45.532,37.054)
  Layer 1 w0.12: v2(43.112,38.854) v4(43.545,38.854)
  Layer 2 w0.1: v6(43.095,38.854) v4(43.545,38.854)
  Bottom Layer w0.2: R92.2@38.162,29.224 R93.2@38.762,29.224 R96.2@39.362,29.224 R95.2@39.962,29.224 40.332,29.224 40.462,29.354 ; v1(40.462,30.004) 40.462,29.354 ; R94.2@40.962,29.234 40.582,29.234 40.462,29.354 ; R68.2@46.582,37.654 46.562,37.634 R70.2@46.562,34.054 47.212,34.054 47.259,34.101 47.559,34.101 v1(47.562,34.104)
  Bottom Layer w0.25: v1@41.912,38.353 42.276,37.989 42.28,37.989 42.34,37.929 42.662,37.929 42.812,37.779 42.812,37.304 42.902,37.214 42.902,37.064 R97.2@42.912,37.054 ; v1(45.562,32.854) 45.912,32.854 46.062,33.004 ; R69.2@46.062,33.454 46.062,33.004 ; v1@47.522,33.597 v1(47.562,33.597) 47.562,33.004 47.412,32.854 46.212,32.854 46.062,33.004
  other v1: 39.512,38.504
EXT_ANT: J1.1 U11.1 | length 20.1
  Top Layer w0.12: U11.1@3.462,17.854 6.362,17.854 ccw(c6.362,19.404) 7.912,19.404 7.912,29.354 ccw(c6.362,29.354) 6.362,30.904 J1.1@4.004,30.904
GLOBAL_EN: D3.1 J3.99 R156.1 R161.1 TP102.TP | length 40.7
  Top Layer w0.1: R156.1@26.212,30.954 26.212,31.559 R161.1@26.203,31.569 v1(26.812,31.569)
  Layer 7 w0.1: v5(10.362,34.464) 10.362,38.404 10.662,38.704 12.879,38.704 13.129,38.454 13.445,38.454 13.595,38.604 v5(13.652,38.604)
  Layer 8 w0.1: v5(10.362,34.464) v3(10.362,34.904) ; v3(13.212,38.604) v5(13.652,38.604)
  Bottom Layer w0.1: v3(10.362,34.904) 10.362,31.004 11.062,30.304 11.062,26.354 11.562,25.854 12.712,25.854 13.162,26.304 13.162,27.354 13.512,27.704 14.974,27.704 15.212,27.942 15.212,28.358 15.359,28.504 23.412,28.504 24.762,29.854 25.662,29.854 26.812,31.004 v1(26.812,31.569)
  Bottom Layer w0.15: D3.1@12.902,38.614 13.922,38.614 14.137,38.829 14.937,38.829 15.076,38.691 15.076,38.281 J3.99@15.102,38.254